# Altium PCB Conv_buck_R1.PcbDoc (part 1 of 2)
Units mm, origin at the board's own origin, x right, y up, seen from the top; angles counter-clockwise.
Board outline 115 x 110 mm, 2 copper layers (Top Layer, Bottom Layer), stack 1.62 mm thick; 149 components, 73 nets, 415 pads, 186 vias.
Unrouted connection lines stored in the file: 3.
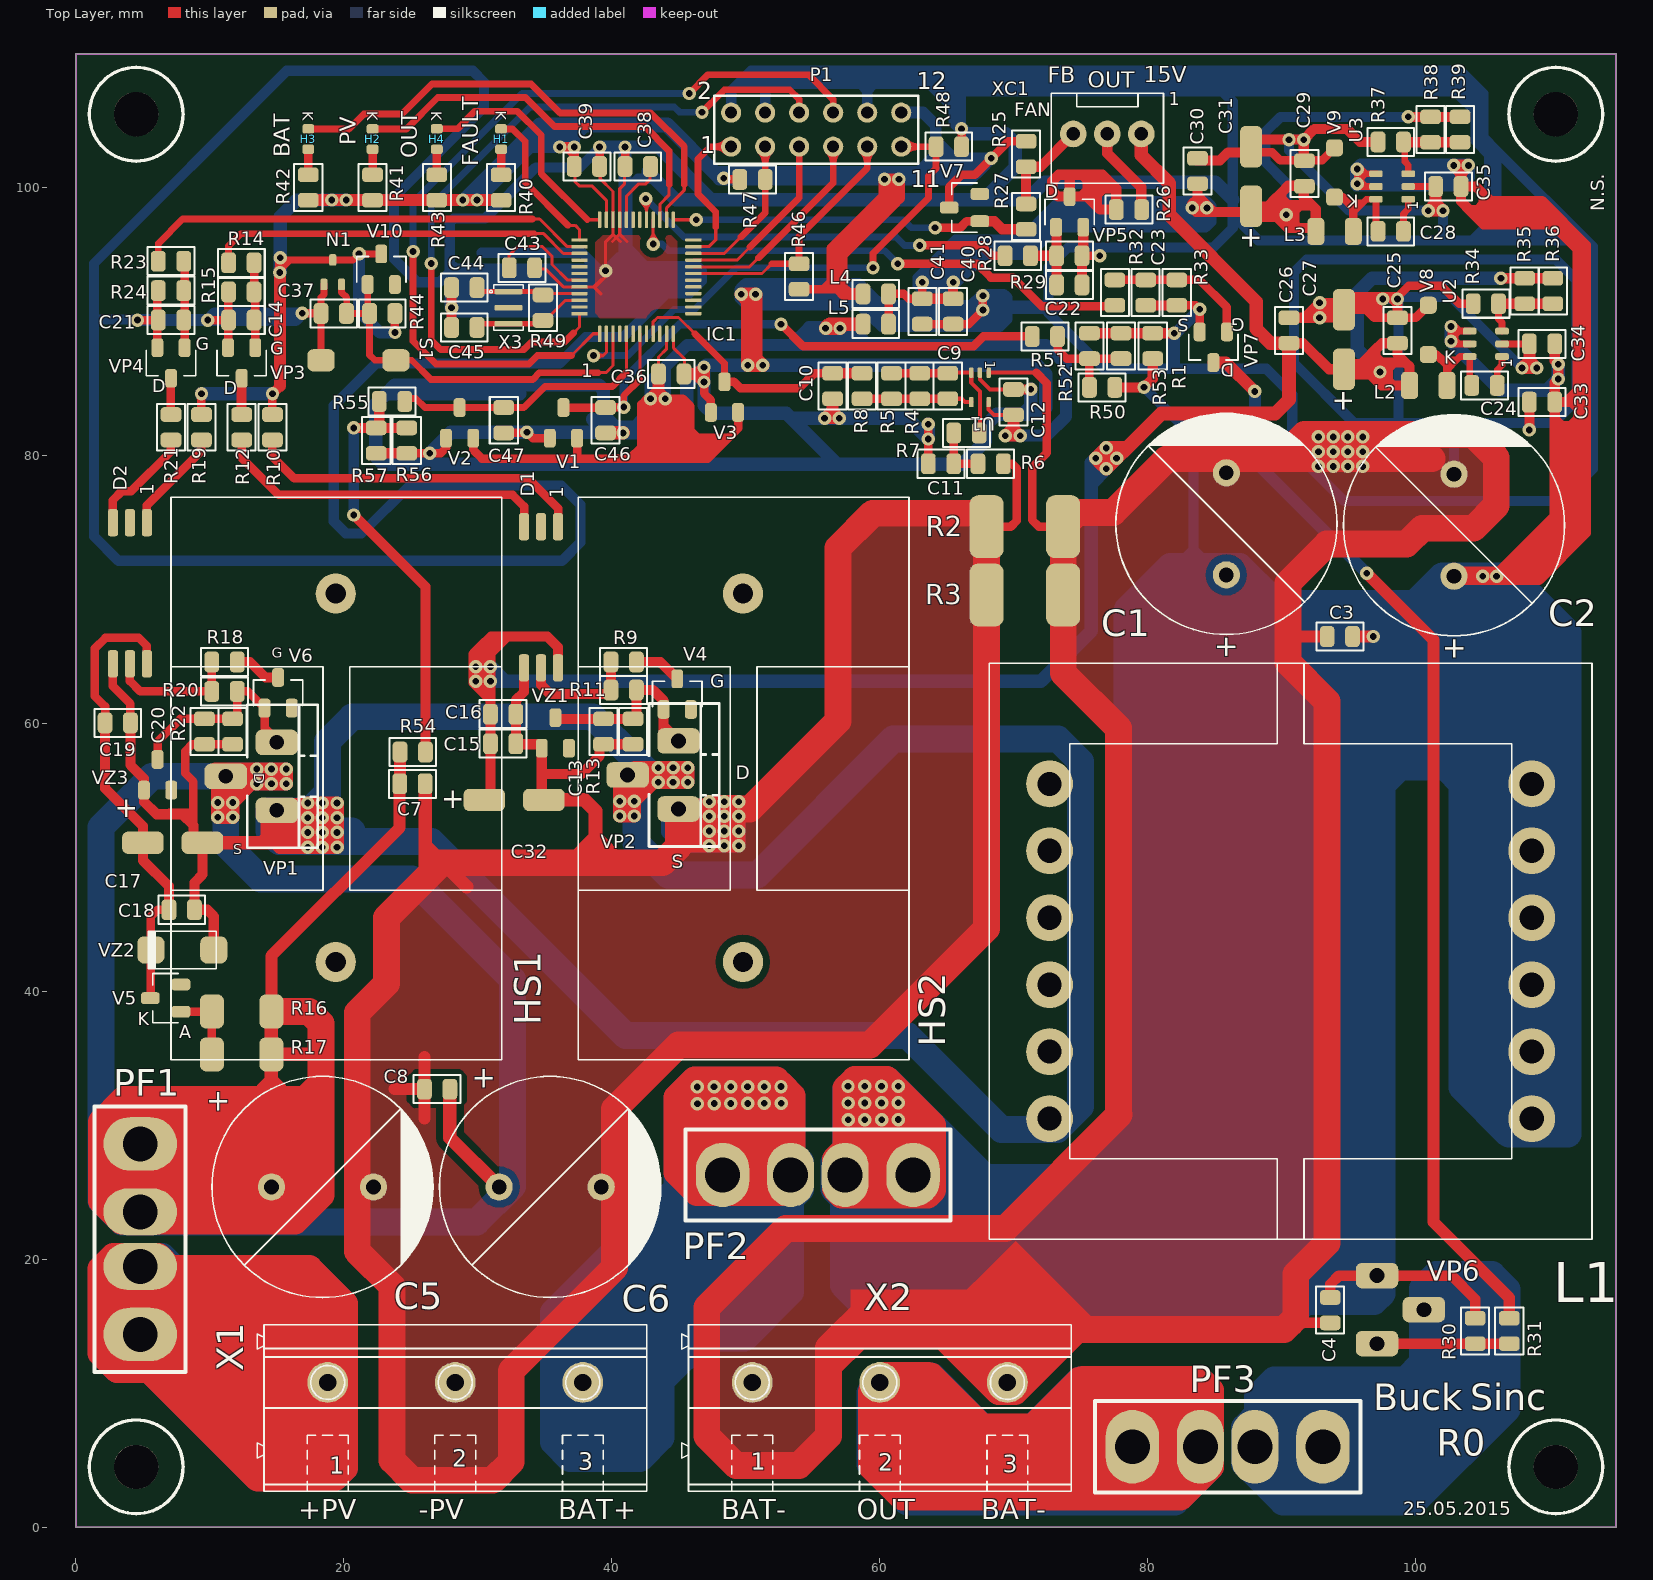
[diagram p0: Top Layer view]
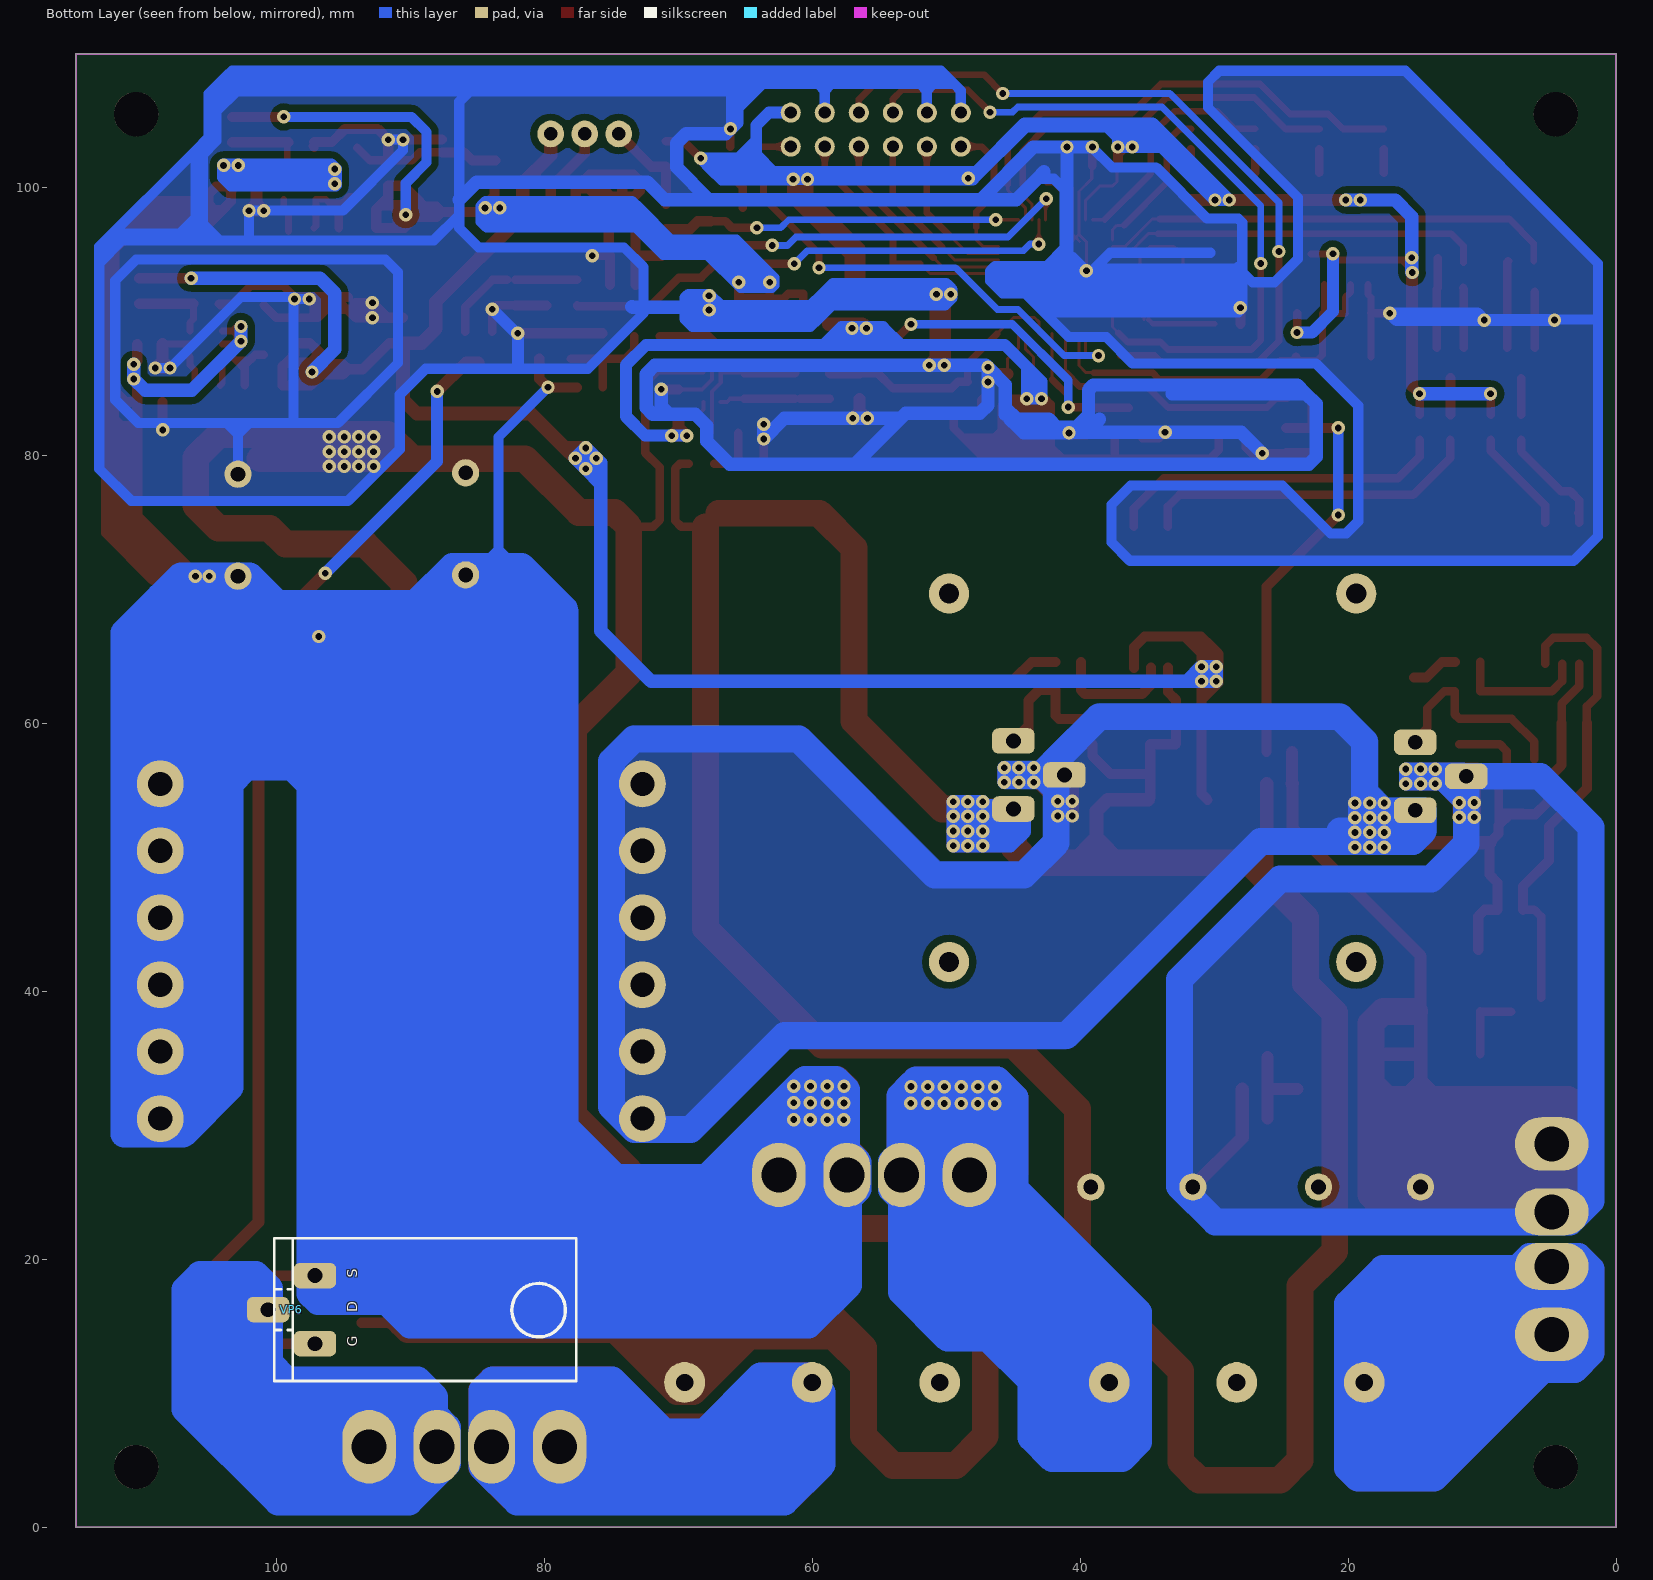
[diagram p1: Bottom Layer view, seen from below]
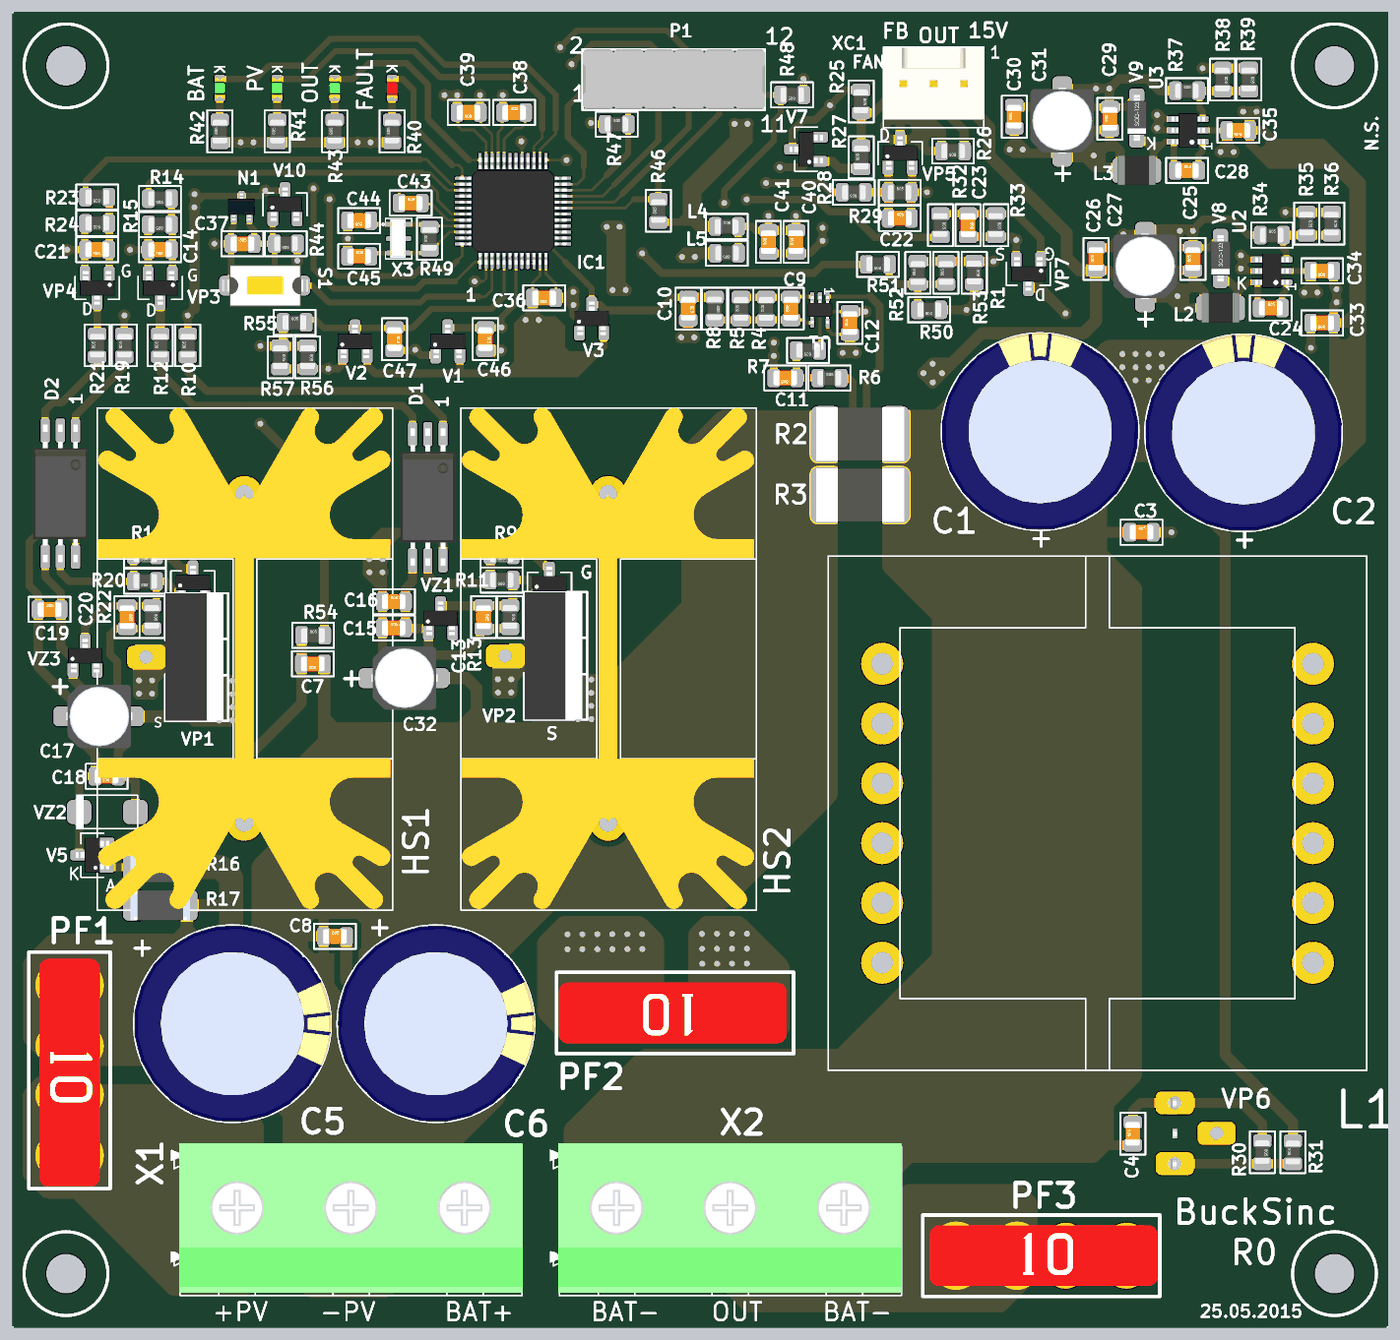
[diagram p3: 3D render of the assembled board from above, using the file's embedded part models]

## Layer stack, top to bottom
Top Layer: signal copper 0.035
Dielectric: core 1.55, FR-4, Dk 4.2
Bottom Layer: signal copper 0.035

## Board outline
0,0 0,110 115,110 115,0

## Design rules (kind name [scope] priority, off if disabled: settings)
AssemblyTestPointUsage [All] p1 off:
AssemblyTestpoint [All] p1 off: testpointundercomponent=TRUE minsize=1.016 maxsize=2.54 preferedsize=1.524 minholesize=0 maxholesize=1.016 preferedholesize=0.813 testpointgrid=0.025 usegrid=FALSE gridtolerance=0 allowsidebottom=TRUE minspacing=2.54
Clearance Terra [InNetClass('Terra') vs InNetClass('-UD') OR InNetClass('DGND')] p1 off: gap=8.001
Clearance -UD [InNetClass('-UD') vs InNetClass('Terra') OR InNetClass('DGND')] p2 off: gap=8.001
Clearance DGND [InNetClass('DGND') vs InNetClass('Terra') OR InNetClass('-UD')] p3 off: gap=8.001
Clearance "Mec Holes" [InNetClass('All Nets') vs InPadClass('Mec Holes')] p4: gap=0.305
Clearance "Fix Holes" [InNetClass('All Nets') vs InPadClass('Fix Holes')] p5: gap=5
Clearance "Keepout Clearance" [InNetClass('All Nets') vs IsKeepOut] p6: gap=0.8
Clearance "Clearance All Typical" [InNetClass('All Nets') vs InNetClass('All Nets')] p7 off: gap=0.508
Clearance "Clearance All 9mils" [All] p8: gap=0.508
ComponentClearance [All] p1 off: gap=0.254 collisioncheckmode=3 verticalgap=0.254 showdistances=FALSE
FabricationTestpoint [All] p1: side=2 testpointundercomponent=TRUE minsize=1.016 maxsize=2.54 preferedsize=1.524 minholesize=0 maxholesize=1.016 preferedholesize=0.813 testpointgrid=0.025 allowsidebottom=TRUE usegrid=FALSE gridtolerance=0 minspacing=2.54
FanoutControl Fanout_BGA [IsBGA] p1 off: bgadir=Out bgaviamode=Centered fanoutstyle=Auto fanoutdirection=Alternating viagrid=0.025 // Fanout_BGA (Default Rule)
FanoutControl Fanout_LCC [IsLCC] p2 off: bgadir=Out bgaviamode=Centered fanoutstyle=Auto fanoutdirection=Alternating viagrid=0.025 // Fanout_LCC (Default Rule)
FanoutControl Fanout_SOIC [IsSOIC] p3 off: bgadir=Out bgaviamode=Centered fanoutstyle=Auto fanoutdirection=Alternating viagrid=0.025 // Fanout_SOIC (Default Rule)
FanoutControl Fanout_Small [(CompPinCount < 5)] p4 off: bgadir=Out bgaviamode=Centered fanoutstyle=Auto fanoutdirection=OutThenIn viagrid=0.025 // Fanout_Small (Default Rule)
FanoutControl Fanout_Default [All] p5 off: bgadir=Out bgaviamode=Centered fanoutstyle=Auto fanoutdirection=Alternating viagrid=0.025 // Fanout_Default (Default Rule)
Height [All] p1 off: minheight=0 maxheight=25.4 prefheight=12.7
HoleSize [All] p1: absolutevalues=TRUE maxlimit=10 minlimit=0.2 maxpercent=80.000 minpercent=20.000
MinimumSolderMaskSliver [All] p1 off: minsoldermaskwidth=0.254
NetAntennae [All] p1 off: netantennaetolerance=0
PolygonConnect "PolygonConnect Power" [All] p1: connectstyle=Direct reliefconductorwidth=0.254 reliefentries=4 polygonreliefangle="90 Angle"
RoutingCorners [All] p1 off: cornerstyle=45-Degree minsetback=2.54 maxsetback=2.54
RoutingVias [All] p1: holewidth=0.3 width=0.635 viastyle="Through Hole" minholewidth=0.2 minwidth=0.635 maxholewidth=0.508 maxwidth=1.27
SilkToSilkClearance [All] p1 off: silktosilkclearance=0.254
SilkscreenOverComponentPads SilkToSolderMaskClearance [IsPad] p1 off: minsilkscreentomaskgap=0.254
SolderMaskExpansion [All] p1: expansion=0.102
Width [All] p1: maxlimit=12.7 minlimit=0.229 preferedwidth=0.254
12 further rules are at their usual default settings.

## Classes and differential pairs
component class Driver_SW: C17 C18 C19 C20 C21 D2 R16 R17 R18 R19 R20 R21 R22 R23 R24 V5 V6 VP4 VZ2 VZ3
component class Converter: C1 C2 C3 C4 C5 C6 C7 C8 L1 R1 R2 R3 VP1 VP2 X1 X2
component class Buck_converter: V1 V2 V3
component class Current_measure_bat: C9 C10 C11 C12 R4 R5 R6 R7 R8 U1
component class Voltage_measure_pv: C47 R54 R55 R56 R57
channel class Voltage_measure: Voltage_measure_bat Voltage_measure_pv
component class Driver_rect: C13 C14 C15 C16 C32 D1 R9 R10 R11 R12 R13 R14 R15 V4 VP3 VZ1
component class FAN: C22 R25 R26 R27 R28 R29 V7 VP5 XC1
component class Output: C23 R30 R31 R32 R33 VP6 VP7
component class SMPS: C24 C25 C26 C27 C28 C29 C30 C31 C33 C34 C35 L2 L3 R34 R35 R36 R37 R38 R39 U2 U3 V8 V9
component class uC: C36 C37 C38 C39 C40 C41 C43 C44 C45 H1 H2 H3 H4 IC1 L4 L5 N1 P1 R40 R41 R42 R43 R44 R46 R47 R48 R49 S1 V10 X3
component class Voltage_measure_bat: C46 R50 R51 R52 R53

## Components (designator, comment, footprint, x,y, rotation, side; value= is the part's Value field where it differs from the comment)
C1 "10190340" "CR 1.1 7.62 16.5" 85.9,71.1 r90 top locked
C2 "10190340" "CR 1.1 7.62 16.5" 102.9,71 r90 top locked
C3 "10192075" C0805_R_V0 94.375,66.5 r0 top
C4 "11736520" C0805_R_V0 93.65,16.2 r90 top
C5 "10190340" "CR 1.1 7.62 16.5" 14.6,25.4 r0 top
C6 "10190340" "CR 1.1 7.62 16.5" 31.6,25.4 r0 top
C7 "10192075" C0805_R_V0 25.125,55.5 r180 top
C8 "11736520" C0805_R_V0 26.975,32.7 r0 top
C9 "10192075" C0805_R_V0 65.1,85.2 r90 top
C10 "10192075" C0805_R_V0 56.5,85.2 r270 top
C11 "10192075" C0805_R_V0 64.6,79.4 r180 top
C12 "10192075" C0805_R_V0 70,84 r90 top
C13 "10192075" C0805_R_V0 39.4,59.4 r270 top (schematic designator C41)
C14 "10192075" C0805_R_V0 12.35,90.125 r180 top (schematic designator C42)
C15 "11736520" C0805_R_V0 31.9,58.5 r0 top (schematic designator C43)
C16 "10192075" C0805_R_V0 31.9,60.7 r0 top (schematic designator C44)
C17 "11690909" "CAP UUD CR 5X5.8" 5,51.1 r0 top (schematic designator C13)
C18 "11736520" C0805_R_V0 7.9,46.1 r180 top (schematic designator C14)
C19 "10192075" C0805_R_V0 3.125,60.05 r0 top (schematic designator C15)
C20 "10192075" C0805_R_V0 9.6,59.4 r270 top (schematic designator C16)
C21 "10192075" C0805_R_V0 7.1,90.125 r180 top (schematic designator C17)
C22 "10192075" C0805_R_V0 74.175,92.75 r0 top (schematic designator C46)
C23 "10192075" C0805_R_V0 79.875,92.175 r270 top (schematic designator C45)
C24 "11736520" C0805_R_V0 105.175,85.25 r0 top (schematic designator C18)
C25 "10192075" C0805_R_V0 98.675,89.35 r90 top (schematic designator C19)
C26 "11736520" C0805_R_V0 90.575,89.35 r90 top (schematic designator C20)
C27 "11690909" "CAP UUD CR 5X5.8" 94.675,86.45 r90 top (schematic designator C21)
C28 "11736520" C0805_R_V0 98.175,96.75 r0 top (schematic designator C22)
C29 "10192075" C0805_R_V0 91.725,101.075 r90 top (schematic designator C23)
C30 "11736520" C0805_R_V0 83.75,101.25 r90 top (schematic designator C24)
C31 "11690909" "CAP UUD CR 5X5.8" 87.75,98.625 r90 top (schematic designator C25)
C32 "11690909" "CAP UUD CR 5X5.8" 30.5,54.3 r0 top (schematic designator C26)
C33 "11736520" C0805_R_V0 109.475,84 r180 top (schematic designator C27)
C34 "10192075" C0805_R_V0 109.475,88.35 r180 top (schematic designator C28)
C35 "10192075" C0805_R_V0 102.475,100.1 r180 top (schematic designator C29)
C36 "2u2F 6.8V 10%" C0805_R_V0 44.45,86.1 r180 top (schematic designator C30)
C37 "11736520" C0805_R_V0 19.25,90.625 r0 top (schematic designator C31)
C38 "2u2F 6.8V 10%" C0805_R_V0 41.95,101.6 r0 top (schematic designator C32)
C39 "1uF 50V 10%" C0805_R_V0 38.15,101.6 r180 top (schematic designator C33)
C40 "1uF 50V 10%" C0805_R_V0 65.5,90.775 r90 top (schematic designator C34)
C41 "100nF 6.8V 10%" C0805_R_V0 63.2,90.775 r90 top (schematic designator C35)
C43 "2u2F 6.8V 10%" C0805_R_V0 33.3,94.025 r0 top (schematic designator C37)
C44 "36pF 50V" C0805_R_V0 29,92.55 r180 top (schematic designator C38)
C45 "36pF 50V" C0805_R_V0 29,89.575 r0 top (schematic designator C39)
C46 "10192075" C0805_R_V0 39.55,82.65 r270 top (schematic designator C40)
C47 "10192075" C0805_R_V0 31.95,82.65 r270 top (schematic designator C40)
D1 "12544475" "SO-6 (11.5 MM)" 36,74.7 r270 top (schematic designator D2)
D2 "12544475" "SO-6 (11.5 MM)" 5.3,75 r270 top (schematic designator D1)
H1 "12133537" "LED 0603_12133537(Primary)" 31.749,104.4 r270 top
H2 "12133535" "LED 0603_12133535(Primary)" 22.15,104.4 r270 top
H3 "12133535" "LED 0603_12133535(Primary)" 17.35,104.4 r270 top
H4 "12133535" "LED 0603_12133535(Primary)" 26.95,104.408 r270 top
HS1 "Comment" DISSIPADOR_N004_40_V1 7.1,76.9 r270 top locked
HS2 "Comment" DISSIPADOR_N004_40_V1 37.5,76.9 r270 top locked
IC1 "TMS320F28027_PT" LQFP48 39.1,89.1 r90 top
L1 "INDUTOR 100uH EE42" "INDUTOR EE42_V1" 90.7,43 r0 top
L2 "12924787" L1210 102.375,85.25 r180 top
L3 "12924787" L1210 95.375,96.75 r180 top
L4 "Inductor" R0805_R_V0 59.725,92.075 r0 top
L5 "Inductor" R0805_R_V0 59.725,89.825 r180 top
N1 "10050567" SC70A 19.175,93.7 r0 top
P1 "Header 6X2" HDR2X6_V0 48.925,103.075 r0 top locked
PF1 "Comment" FUSE_HOLDER#1 4.8,21.5 r90 top
PF2 "Comment" FUSE_HOLDER#2 55.4,26.3 r0 top
PF3 "Comment" FUSE_HOLDER#1 86,6 r180 top
R1 "10118077" R0805_R_V0 80.4,88.2 r270 top
R2 "11372881" WSL2816A 68,74.7 r0 top
R3 "11372881" WSL2816A 68,69.6 r0 top
R4 "10118077" R0805_R_V0 63,85.2 r90 top
R5 "10118077" R0805_R_V0 60.9,85.2 r90 top
R6 "10118077" R0805_R_V0 68.3,79.4 r0 top
R7 "10118077" R0805_R_V0 66.5,81.7 r180 top
R8 "10118077" R0805_R_V0 58.7,85.2 r270 top
R9 "10118077" R0805_R_V0 40.9,64.6 r180 top (schematic designator R38)
R10 "10118077" R0805_R_V0 14.675,82.125 r90 top (schematic designator R39)
R11 "10118077" R0805_R_V0 40.9,62.5 r180 top (schematic designator R40)
R12 "10118077" R0805_R_V0 12.375,82.125 r90 top (schematic designator R41)
R13 "10118077" R0805_R_V0 41.6,59.4 r270 top (schematic designator R42)
R14 "10118077" R0805_R_V0 12.35,94.4 r180 top (schematic designator R43)
R15 "10118077" R0805_R_V0 12.35,92.225 r180 top (schematic designator R44)
R16 "10191999" R2010A 14.6,38.5 r180 top (schematic designator R9)
R17 "10191999" R2010A 14.6,35.3 r180 top (schematic designator R10)
R18 "10118077" R0805_R_V0 11.1,64.6 r180 top (schematic designator R11)
R19 "10118077" R0805_R_V0 9.375,82.125 r90 top (schematic designator R12)
R20 "10118077" R0805_R_V0 11.1,62.4 r180 top (schematic designator R13)
R21 "10118077" R0805_R_V0 7.1,82.125 r90 top (schematic designator R14)
R22 "10118077" R0805_R_V0 11.7,59.4 r270 top (schematic designator R15)
R23 "10118077" R0805_R_V0 7.1,94.525 r180 top (schematic designator R16)
R24 "10118077" R0805_R_V0 7.1,92.325 r180 top (schematic designator R17)
R25 "10118077" R0805_R_V0 70.95,102.525 r270 top (schematic designator R49)
R26 "10118077" R0805_R_V0 78.625,98.375 r180 top (schematic designator R50)
R27 "10118077" R0805_R_V0 70.95,97.85 r90 top (schematic designator R51)
R28 "10118077" R0805_R_V0 70.325,94.925 r180 top (schematic designator R52)
R29 "10118077" R0805_R_V0 74.175,94.925 r0 top (schematic designator R53)
R30 "10118077" R0805_R_V0 104.475,14.65 r270 top (schematic designator R45)
R31 "10118077" R0805_R_V0 107.025,14.65 r90 top (schematic designator R46)
R32 "10118077" R0805_R_V0 77.575,92.175 r270 top (schematic designator R47)
R33 "10118077" R0805_R_V0 82.2,92.175 r270 top (schematic designator R48)
R34 "10191981" R0805_R_V0 105.275,91.35 r0 top (schematic designator R18)
R35 "10191981" R0805_R_V0 108.175,92.3 r270 top (schematic designator R19)
R36 "10191981" R0805_R_V0 110.275,92.3 r270 top (schematic designator R20)
R37 "10191981" R0805_R_V0 98.175,103.425 r0 top (schematic designator R21)
R38 "10191981" R0805_R_V0 101.15,104.35 r270 top (schematic designator R22)
R39 "10191981" R0805_R_V0 103.35,104.35 r270 top (schematic designator R23)
R40 "10191962" R0805_R_V0 31.75,100.025 r90 top (schematic designator R24)
R41 "10191962" R0805_R_V0 22.15,100.025 r90 top (schematic designator R25)
R42 "10191962" R0805_R_V0 17.35,100.025 r90 top (schematic designator R26)
R43 "10191962" R0805_R_V0 26.95,100.025 r90 top (schematic designator R27)
R44 "11417855" R0805_R_V0 22.875,90.625 r180 top (schematic designator R28)
R46 "1k 5% 0805" R0805_R_V0 54,93.375 r90 top (schematic designator R30)
R47 "1k 5% 0805" R0805_R_V0 50.525,100.625 r0 top (schematic designator R31)
R48 "1k 5% 0805" R0805_R_V0 65.175,103.075 r180 top (schematic designator R32)
R49 "1M 1% 0805" R0805_R_V0 34.875,91.05 r90 top (schematic designator R33)
R50 "10118077" R0805_R_V0 76.625,85.1 r180 top (schematic designator R34)
R51 "10118077" R0805_R_V0 72.35,88.9 r180 top (schematic designator R35)
R52 "10118077" R0805_R_V0 75.675,88.2 r90 top (schematic designator R36)
R53 "10118077" R0805_R_V0 78.038,88.2 r90 top (schematic designator R37)
R54 "10118077" R0805_R_V0 25.15,57.875 r0 top (schematic designator R34)
R55 "10118077" R0805_R_V0 23.6,84.05 r0 top (schematic designator R35)
R56 "10118077" R0805_R_V0 24.7,81.125 r270 top (schematic designator R36)
R57 "10118077" R0805_R_V0 22.425,81.125 r270 top (schematic designator R37)
S1 "10050610" "TECLA STSM BOURNS" 21.1,87.125 r0 top
U1 "OPA348AIDCKR" "DCK R-PDSO-G5" 67.5,85.1 r270 top
U2 "12576507" SOT23-6 105.275,88.35 r90 top
U3 "12576507" SOT23-6 98.275,100.1 r90 top
V1 "DIODO BAS40" SOT23-BAV99A 36.4,82.45 r0 top
V2 "DIODO BAS40" SOT23-BAV99A 28.65,82.45 r0 top
V3 "DIODO BAS40" SOT23-BAV99A 48.425,84.375 r0 top
V4 "10261302" SOT23A 44.9,62.2 r0 top (schematic designator V9)
V5 "10261302" SOT23A 6.7,39.5 r90 top (schematic designator V4)
V6 "10261302" SOT23A 15.1,62.3 r0 top (schematic designator V5)
V7 "10261302" SOT23A 66.35,98.525 r90 top (schematic designator V10)
V8 "10192125" SOD123A 100.975,87.55 r90 top (schematic designator V6)
V9 "10192125" SOD123A 93.975,99.3 r90 top (schematic designator V7)
V10 "10192124" SOT23A 22.8,93.925 r0 top (schematic designator V8)
VP1 "10190449" TO-220AB_V1 15,58.6 r270 top
VP2 "10190449" TO-220AB_V1 45,58.7 r270 top
VP3 "11110327" MOS_SOT23A 12.375,86.925 r180 top (schematic designator VP4)
VP4 "11110327" MOS_SOT23A 7.1,86.925 r180 top (schematic designator VP3)
VP5 "11110327" MOS_SOT23A 74.2,98.2 r0 top (schematic designator VP7)
VP6 "10190449" TO-220AB_H_V1 97.15,13.7 r90 bottom (schematic designator VP5)
VP7 "11110327" MOS_SOT23A 84.925,88.1 r180 top (schematic designator VP6)
VZ1 "10050447" ZEN_SOT23A 35.8,59.3 r0 top (schematic designator VZ3)
VZ2 "12665621" DO-214AC_12665621(Primary) 5.6,43.1 r0 top (schematic designator VZ1)
VZ3 "10050447" ZEN_SOT23A 6.1,56.175 r0 top (schematic designator VZ2)
X1 "10233722" 662-A-111/03-SM 18.8,10.8 r0 top
X2 "10233722" 662-A-111/03-SM 50.5,10.8 r0 top
X3 "XTAL 60MHz" "XTAL  CSTCE_G_A" 32.3,91.05 r90 top
XC1 "10190697" "MOLEX 3P 180G M" 79.55,104.025 r0 top

## Footprints (in the part's own frame and the unit in brackets; to place one, negate y for a bottom-side part, rotate by r counter-clockwise, add the part's x,y. Pads: shape width x height; smd on the part's side, far side on the other; paste and mask are expansions set on the pad)
662-A-111/03-SM [mil]
  round 120 hole 51.18: 1(0,0) 2(375,0) 3(750,0)
  silkscreen extent -208,-320 938,170, body extent -218,-311 939,181, height 847
C0805_R_V0 [mm] "IPC"
  rrect50% 1.1x1.55 smd: 1(0.95,0) 2(-0.95,0)
  silkscreen extent -1.75,-1.05 1.75,1.05, body extent -1,-0.62 1,0.63, height 0.78
"CAP UUD CR 5X5.8" [mm]
  rrect50% 3.1x1.651 smd: 1(0,0) 2(4.445,0)
  body extent -0.46,-2.65 5.04,2.65, height 6
"CR 1.1 7.62 16.5" [mil]
  round 80 hole 43.31: 1(0,0) 2(300,0)
  silkscreen extent -175,-325 475,325, body extent -174,-324 475,324, height 1030
"DCK R-PDSO-G5" [mm] "SOT23, 5-Leads, Body 2x1.25mm, Pitch 0.65mm"
  rrect50% 0.762x0.338 smd: 1(-1.1,0.65) 2(-1.1,0) 3(-1.1,-0.65) 4(1.1,-0.65) 5(1.1,0.65)
  body extent -1.15,-1.05 1.15,1.05, height 1
DISSIPADOR_N004_40_V1 [mm] "AAVID_6298B_ 5mm from board"
  round 3 hole 1.5: Fix1(7.2,12.3) Fix1(34.7,12.3)
  silkscreen extent 0,0 42,24.7, body extent -0.01,0.08 41.9,24.52, height 27.9
DO-214AC_12665621(Primary) [mil]
  rrect50% 80x80 smd: A(185,0) K(0,0)
  silkscreen extent -8,-55 192,55
FUSE_HOLDER#1 [mm] "Automotive 3522-2 Keystone"
  oval 4x5.5 hole 2.6: 1(-7.112,0) 2(7.112,0)
  oval 3.5x5.5 hole 2.6: 1(-2.032,0) 2(2.032,0)
  silkscreen extent -9.9,-3.4 9.9,3.4, body extent -9.72,-2.54 9.33,2.54, height 20
FUSE_HOLDER#2 [mm] "Automotive 3522-2 Keystone"
  oval 4x4.8 hole 2.6: 1(-7.112,0) 2(7.112,0)
  oval 3.5x4.8 hole 2.6: 1(-2.032,0) 2(2.032,0)
  silkscreen extent -9.9,-3.4 9.9,3.4, body extent -9.72,-2.54 9.33,2.54, height 20
HDR2X6_V0 [mm] "Connector; Header; 6x2 Position"
  round 1.5 hole 0.9: 1(0,0) 2(0,2.54) 3(2.54,0) 4(2.54,2.54) 5(5.08,0) 6(5.08,2.54) 7(7.62,0) 8(7.62,2.54) 9(10.16,0) 10(10.16,2.54) 11(12.7,0) 12(12.7,2.54)
  silkscreen extent -1.27,-1.27 13.97,3.81, body extent -1.22,-1.2 14.02,3.8, height 8.8
"INDUTOR EE42_V1" [mm]
  round 3.5 hole 1.8: 1(-18,-12.5) 1(-18,-7.5) 1(-18,-2.5) 1(-18,2.5) 1(-18,7.5) 1(-18,12.5) 2(18,-12.5) 2(18,-7.5) 2(18,-2.5) 2(18,2.5) 2(18,7.5) 2(18,12.5)
  silkscreen extent -22.5,-21.5 22.5,21.5, body extent -22.5,-21.5 22.5,21.5, height 35
L1210 [mil] "Indutor SMD"
  rrect50% 50x80 smd: 1(0,0) 2(110,0)
  body extent -8,-50 118,48, height 98
"LED 0603_12133535(Primary)" [mil]
  rrect50% 28x35 smd: A(60,0) K(0,0)
  body extent -3,-18 63,18, height 35
"LED 0603_12133537(Primary)" [mil]
  rrect50% 28x35 smd: A(60,0) K(0,0)
  body extent -2,-18 64,18, height 35
LQFP48 [mil]
  rrect50% 48x10 smd: 1(0.15,-0.2) 2(0.15,-19.89) 3(0.15,-39.57) 4(0.15,-59.26) 5(0.15,-78.94) 6(0.15,-98.63) 7(0.15,-118.32) 8(0.15,-138) 9(0.15,-157.69) 10(0.15,-177.37) 11(0.15,-197.06) 12(0.15,-216.74) 25(335.3,-216.74) 26(335.3,-197.06) 27(335.3,-177.37) 28(335.3,-157.69) 29(335.3,-138) 30(335.3,-118.32) 31(335.3,-98.63) 32(335.3,-78.94) 33(335.3,-59.26) 34(335.3,-39.57) 35(335.3,-19.89) 36(335.3,-0.2)
  rrect50% 10x48 smd: 13(59.2,-275.8) 14(78.89,-275.8) 15(98.57,-275.8) 16(118.26,-275.8) 17(137.94,-275.8) 18(157.63,-275.8) 19(177.31,-275.8) 20(197,-275.8) 21(216.68,-275.8) 22(236.37,-275.8) 23(256.06,-275.8) 24(275.74,-275.8) 37(275.74,58.85) 38(256.06,58.85) 39(236.37,58.85) 40(216.68,58.85) 41(197,58.85) 42(177.31,58.85) 43(157.63,58.85) 44(137.94,58.85) 45(118.26,58.85) 46(98.57,58.85) 47(78.89,58.85) 48(59.2,58.85)
  body extent -10,-286 345,69, height 63
"MOLEX 3P 180G M" [mm]
  round 2 hole 1: 1(0,0) 2(-2.54,0) 3(-5.08,0)
  silkscreen extent -6.73,-3.68 1.65,3.05, body extent -6.69,-3 1.61,3, height 11.5
MOS_SOT23A [mil]
  rrect50% 35x55 smd: D(0,45) G(-40,-45) S(40,-45)
  silkscreen extent -72,-38 72,38, body extent -57,-55 57,55, height 51
R0805_R_V0 [mm] "IPC"
  rrect50% 1.1x1.55 smd: 1(0.95,0) 2(-0.95,0)
  silkscreen extent -1.75,-1.05 1.75,1.05, body extent -1.02,-0.63 0.98,0.62, height 0.78
R2010A [mil]
  rrect50% 70x100 smd: 1(0,0) 2(175,0)
  body extent -11,-50 186,50, height 22
SC70A [mil]
  rrect50% 20.98x34 smd: GND(-26,-36) VCC(0,36) ~RESET(26,-36)
  body extent -44,-44 44,44, height 44
"SO-6 (11.5 MM)" [mil]
  rrect50% 80x30 smd: 1(0,0) 2(0,-50) 3(0,-100) 4(415,-100) 5(415,-50) 6(415,0)
  body extent -19,-140 433,40, height 130
SOD123A [mil]
  rrect50% 50x50 smd: A(145,0) K(0,0)
  body extent -3,-34 149,33, height 57
SOT23-6 [mil]
  rrect50% 20x40 smd: 1(-37.5,-47.5) 2(0,-47.5) 3(37.5,-47.5) 4(37.5,47.5) 5(0,47.5) 6(-37.5,47.5)
  body extent -57,-55 57,55, height 57
SOT23-BAV99A [mil]
  rrect50% 35x55 smd: A(-40,-45) AK(0,45) K(40,-45)
  body extent -57,-55 57,55, height 51
SOT23A [mil]
  rrect50% 35x55 smd: A(-40,-45) K(0,45) NC(40,-45)
  silkscreen extent -72,-38 72,38, body extent -57,-55 57,55, height 51
"TECLA STSM BOURNS" [mil]
  rrect50% 80x65 smd: 1(-110,0) 2(110,0)
  body extent -140,-69 144,69, height 169
TO-220AB_H_V1 [mm]
  rrect50% 1.905x3.175 hole 1.1: D(2.54,3.5) G(0,0) S(5.08,0)
  silkscreen extent -2.79,-19.5 7.87,3.05, body extent -2.5,-19.5 7.5,0.2, height 6
TO-220AB_V1 [mm]
  rrect50% 1.905x3.175 hole 1.1: D(2.54,-3.81) G(0,0) S(5.08,0)
  silkscreen extent -2.79,-2.21 7.87,3.05, body extent -2.8,-2.18 7.88,2.65, height 19.89
WSL2816A [mm]
  rrect50% 2.54x4.7 smd: 1(0,0) 2(5.715,0)
  body extent -0.82,-2.22 6.53,2.23, height 0.91
"XTAL  CSTCE_G_A" [mm]
  rrect50% 0.4x2.1 smd: 0(0,0) 1(1.2,0) 2(-1.2,0)
  silkscreen extent -1.7,-1.1 1.7,1.4, body extent -1.6,-0.6 1.6,0.7, height 0.7
ZEN_SOT23A [mil]
  rrect50% 35x55 smd: A(-40,-45) K(0,45) NC(40,-45)
  body extent -57,-55 57,55, height 51

## Part data
C1 C2 C5 C6: "CAP ELE 1000uF 50V"
C3 C7 C9 C10 C11 C12 C13 C14 C16 C19 C20 C21 C22 C23 C25 C29 C34 C35 C46 C47: "CER SMD 100nF 50V"
C4 C8 C15 C18 C24 C26 C28 C30 C33 C37: "CER SMD X7R 1uF 50V 10%"
C17 C27 C31 C32: "CAP. ELET. SMD 22uF 35V"
C36 C38 C39 C40 C41 C43: library part 11736520, "CER SMD X7R 1uF 50V 10%"
C44 C45: library part 11736520, "CER SMD C0G 36pF 50V"
D1 D2: "CI SMD ACPL-W343"
H1: "LED SMD VM (0603)"
H2 H3 H4: "LED SMD VD (0603)"
IC1: "LQFP48"
L1: library part 12578205, "INDUTOR 560uH 4A PCV-2"
L2 L3: "INDUTOR SMD 47uH 390mA"
N1: "CI SMD ADM803TAKSZ"
P1: "Header, 6-Pin, Dual row"
R1 R4 R5 R6 R7 R8 R9 R10 R11 R12 R13 R14 R15 R18 R19 R20 R21 R22 R23 R24 R25 R26 R27 R28 R29 R30 R31 R32 R33 R50 R51 R52 R53 R54 R55 R56 R57: "RFM SMD 1K 1% 0.1W"
R2 R3: "RFM SMD 0R015 1% 2W"
R16 R17: "RFM SMD 1K 1% 0.5W"
R34 R35 R36 R37 R38 R39: "RFM SMD 150R 1% 0.1W"
R40 R41 R42 R43: "RFM SMD 330R 5% 0.1W"
R44: "RES SMD 4K7 5% 0,063W"
R46 R47 R48 R49: library part Res3_2, "Resistor"
S1: "Tecla SMD STSM-31-STR"
U1: "1 MHz, 45 uA, RRIO, Single Operational Amplifier, 2.1 to 5.5 V, -40 to 125 degC, 5-pin SOT23 (DCK5), Green (RoHS & no Sb/Br)"
U2 U3: "CI SMD LM2842"
V1 V2 V3 V10: "DIODO SMD BAS40"
V4 V5 V6 V7: "DIODO SMD BAS16"
V8 V9: "Diodo SMD MBR0540 (SCHOTTKY)"
VP1 VP2 VP6: "MOSFET IRFB31N20D"
VP3 VP4 VP5 VP7: "MOSFET SMD BSH111"
VZ1 VZ3: "Zener  SMD BZX84C18"
VZ2: "ZENER SMD 15V 2W"
X1 X2: "CON. EK950V-03P"
X3: library part XTAL, "Crystal Oscillator"
XC1: "CON MOLEX 3P 180G"

## Free pads (board coordinates)
  round 3.3 hole 3.3 unplated mask+0.102: Fix-1(4.5,4.5) Fix-2(110.5,4.5) Fix-3(110.5,105.5) Fix-4(4.5,105.5)

## Via types
v1: diameter 1, hole 0.5, Top Layer to Bottom Layer, tented both sides, 186 vias

## Nets (pads, with @x,y where several pads share a name; then routed paths per layer and width w, separated by ;. In a path a pad name is that pad's centre, name@x,y a point inside that pad or via, vN(x,y) a via of type N, cw(c..) or ccw(c..) an arc to the next point about the centre after c; other vN are vias at no path point)
3V3: C29.2 C30.2 C31.1 C40.1 C41.1 L3.2 L4.1 L5.2 R38.2 R39.2 | length 139.4
  Top Layer w0.635: L5.2@60.675,89.825 L4.1@60.675,92.075 61.825,92.075 62.175,91.725 C41.1@63.2,91.725 v1(63.2,92.95)
  Top Layer w0.762: C41.1@63.2,91.725 C40.1@65.5,91.725 v1(65.5,92.95) ; C30.2@83.675,100.15 C30.2@83.75,100.15 ; C30.2@83.75,100.3 C30.2@83.75,100.15 ; v1@90.575,97.7 89.975,98.3 ; v1(99.475,105.3) R39.2@103.35,105.3 ; v1(83.35,98.5) 83.75,98.9 83.75,99.2 ; v1(83.35,98.5) 83.65,98.2 v1@84.75,98.2 ; v1(83.35,98.5) 83.35,98.8 83.75,99.2 ; 83.75,99.2 83.75,99.425 ; 83.75,99.2 v1(84.45,98.5) v1@84.75,98.2 ; 83.75,99.425 C30.2@83.75,100.15 ; 83.75,99.425 84.975,98.2 ; v1@84.75,98.2 84.975,98.2 ; 84.975,98.2 C31.1@87.675,98.2 ; C31.1@87.675,98.2 88.05,97.825 89.65,97.825 ; C31.1@87.675,98.2 88.075,98.6 88.975,98.6 ; C31.1@87.675,98.2 C31.1@88.575,98.2 ; C31.1@88.575,98.2 89.275,98.2 89.65,97.825 ; C31.1@88.575,98.2 88.975,98.6 ; 88.975,98.6 89.275,98.9 ; 89.275,98.9 89.375,98.9 ; 89.275,98.9 89.375,99 ; 89.375,98.9 89.375,99 ; 89.375,98.9 89.975,98.3 ; 89.375,99 90.025,99.65 ; 89.65,97.825 90.475,97 91.275,97 ; 89.975,98.3 90.975,98.3 ; 90.025,99.65 90.025,99.15 90.475,98.7 91.375,98.7 ; 90.025,99.65 90.525,100.15 91.675,100.15 91.675,99.3 92.275,98.7 ; 90.975,98.3 91.375,98.7 ; 90.975,98.3 90.975,97.3 91.275,97 ; 91.275,97 92.581,97 92.581,98.394 92.275,98.7 ; 91.375,98.7 92.275,98.7
  Bottom Layer w0.762: v1@63.2,92.975 v1@65.5,92.975 ; v1@63.2,93.125 66.2,96.125 ; v1@65.5,93.125 67.375,95 67.85,95 ; v1(90.375,98) 90.375,100.35 88.825,101.9 88.825,104.175 89.95,105.3 v1(99.475,105.3) ; 66.2,96.125 70.575,96.125 72.95,98.5 ; 66.2,96.125 65.675,96.125 62.85,93.3 62.85,92.725 63.044,92.531 65.381,92.531 67.85,95 ; 67.85,95 71.154,95 73.204,97.05 83.825,97.05 ; 72.95,98.5 v1(83.35,98.5) v1(84.45,98.5) 84.45,97.675 83.825,97.05 ; 72.95,98.5 73.475,99.025 84.4,99.025 84.775,98.65 84.775,97.475 84.35,97.05 83.825,97.05
15V: C15.2 C16.2 C25.2 C26.2 C27.1 C32.1 D1.6 L2.2 R35.2 R36.2 XC1.1 | length 200.8
  Top Layer w0.762: C32.1@30.5,54.3 30.95,54.75 C15.2@30.95,58.5 30.95,61.8 ; D1.6@36,64.159 36,65.7 35.2,66.5 32.2,66.5 ; C26.2@90.675,88.4 91.625,88.4 93.575,86.45 C27.1@94.675,86.45 ; v1@97.575,85.95 96.975,86.55 ; v1(106.4,93.25) R35.2@108.175,93.25 R36.2@110.275,93.25 ; 30.3,62.45 30.95,61.8 ; 30.3,62.45 30.3,65.45 ; 30.3,62.45 29.7,63.05 29.7,65.2 30.3,65.8 ; 30.3,65.45 31.35,66.5 ; 30.3,65.45 30.3,65.8 ; 30.3,65.8 31,66.5 31.35,66.5 ; 30.95,61.8 v1(30.95,63.15) v1(30.95,64.25) 30.95,65.25 32.2,66.5 ; 31.35,66.5 32.2,66.5 ; C27.1@94.675,86.45 95.075,86.85 95.975,86.85 ; C27.1@94.675,86.45 95.05,86.075 96.65,86.075 ; C27.1@94.675,86.45 95.575,86.45 ; 95.575,86.45 95.975,86.85 ; 95.575,86.45 96.275,86.45 96.65,86.075 ; 95.975,86.85 96.275,87.15 ; 96.275,87.15 96.375,87.25 ; 96.275,87.15 96.375,87.15 ; 96.375,87.15 96.975,86.55 ; 96.375,87.15 96.375,87.25 ; 96.375,87.25 97.025,87.9 ; 96.65,86.075 97.475,85.25 98.275,85.25 ; 96.975,86.55 97.975,86.55 ; 97.025,87.9 97.525,88.4 C25.2@98.675,88.4 98.675,87.55 99.275,86.95 ; 97.025,87.9 97.025,87.4 97.475,86.95 98.375,86.95 ; 97.975,86.55 98.375,86.95 ; 97.975,86.55 97.975,85.55 98.275,85.25 ; 98.275,85.25 L2.2@99.581,85.25 99.581,86.644 99.275,86.95 ; 98.375,86.95 99.275,86.95
  Top Layer w1.016: XC1.1@79.55,104.025 79.55,102.425 81.65,100.325 81.65,97.975 88.125,91.5 88.125,89.466 89.191,88.4 C26.2@90.575,88.4 90.575,84.175 89.55,83.15 81.05,83.15 78.481,80.581 ; 76.538,79.413 v1(76.147,79.803) v1(76.925,80.581) ; 76.538,79.413 v1(76.925,79.025) 77.313,79.413 ; 76.538,79.413 77.313,79.413 ; v1(76.925,80.581) v1(77.703,79.803) ; v1(76.925,80.581) 78.481,80.581 ; 77.313,79.413 v1(77.703,79.803) ; v1(77.703,79.803) 78.481,80.581
  Bottom Layer w1: v1(97.375,86.25) 95.675,87.95 95.675,92.15 96.775,93.25 v1(106.4,93.25)
  Bottom Layer w1.016: v1(29.85,64.25) v1(29.85,63.15) v1(30.95,63.15) ; 29.875,63.65 30.95,63.65 ; v1@30.025,64.25 v1(30.95,64.25) ; 32.35,63.15 32.05,63.15 ; v1@76.925,80.103 75.822,79 ; v1(30.95,63.15) 32.05,63.15 ; v1(30.95,63.15) 30.95,63.65 ; 30.95,63.65 v1(30.95,64.25) ; v1(30.95,64.25) 32.05,63.15 ; 32.05,63.15 72.05,63.15 75.822,66.922 75.822,77.922 ; 75.822,77.922 v1(76.925,79.025) v1(77.703,79.803) v1(76.925,80.581) v1(76.147,79.803) 75.822,79.478 75.822,79 ; 75.822,77.922 75.822,79
-PV: C5.2 C6.2 C7.2 C8.2 C13.1 C15.1 C16.1 C32.2 D1.4 R2.1 R3.1 R6.1 R13.1 VP2.S VZ1.A X1.2 | length 306.2
  Top Layer w0.635: R2.1@67.85,74.85 R2.1@68,74.7 69.8,74.7 70.257,75.157 70.257,79.043 69.9,79.4 R6.1@69.25,79.4
  Top Layer w0.762: D1.4@33.46,64.159 33.46,62.36 32.85,61.75 C16.1@32.85,60.7 C15.1@32.85,58.5 32.893,58.457 34.784,58.457 VZ1.A@34.784,58.157 34.784,54.461 C32.2@34.945,54.3 ; 34.784,56.225 37.725,56.225 39.1,57.6 39.1,58.45 R13.1@41.4,58.45
  Top Layer w0.889: 23.8,32.7 C8.2@26.025,32.7 ; 26.025,30.525 C8.2@26.025,32.7 ; 26.025,35.1 C8.2@26.025,32.7
  Top Layer w1: 26.075,48.375 26.075,50.925 ; C7.2@26.075,55.5 26.075,50.925 ; 29.175,47.825 27.4,49.6 26.075,50.925 ; VP2.S@45.28,53.9 47.03,53.9 v1(47.3,54.17) ; v1@46.9,53.07 v1(47.3,53.07) ; v1(47.3,50.87) v1(47.3,51.97) v1(47.3,53.07) ; v1(47.3,53.07) 47.3,53.62 ; v1(47.3,53.07) v1(48.4,53.07) v1(49.5,53.07) 49.5,53.62 ; v1(47.3,53.07) 47.85,53.62 ; 47.3,53.62 v1(47.3,54.17) ; 47.3,53.62 47.85,53.62 ; v1(47.3,54.17) v1(48.4,54.17) ; 47.85,53.62 v1(48.4,54.17) ; 47.85,53.62 49.5,53.62 ; v1(48.4,54.17) v1(49.5,54.17) 49.5,53.62
  Top Layer w1.016: C32.2@34.945,54.3 37.975,54.3 38.8,53.475 38.8,51.525 ; 36.575,49.6 36.875,49.6 38.8,51.525 ; 37.409,50.066 39.716,50.066 39.25,49.6 ; 38.8,50.091 38.8,51.525 ; 40.725,49.6 38.8,51.525 ; 44.9,51.2 45,51.2 v1@46.97,51.2 ; 45.23,50.87 v1(47.3,50.87) v1(48.4,50.87) v1(49.5,50.87) v1(49.5,51.97) v1(49.5,53.07)
  Top Layer w2: 36.575,49.6 27.4,49.6 27.3,49.6 26.075,48.375 23.2,45.5 23.2,40.6 21,38.4 21,20.6 23.6,18 23.6,5 25.1,3.5 31.125,3.5 32.5,4.875 32.5,11.65 40.22,19.37 40.22,31.22 45,36 59.3,36 68,44.7 R3.1@68,69.6 R2.1@68,74.7 ; 36.875,49.6 39.25,49.6 40.725,49.6 43.8,49.6 45,50.8 ; 45,51.2 VP2.S@45,53.325 ; 49.5,53.62 50.32,53.62 56.9,60.2 56.9,73.1 59.5,75.7 R2.1@67,75.7
  Bottom Layer w1: VP2.S@44.2,52.82 44.2,51.9 45.23,50.87 v1(47.3,50.87) v1(48.4,50.87) v1(49.5,50.87) v1(49.5,51.97) v1(49.5,53.07) v1(49.5,54.17) ; VP2.S@45,53.62 45.23,53.85 46.98,53.85 v1(47.3,54.17) v1(48.4,54.17) v1(49.5,54.17) ; v1@49.496,54.166 v1(49.5,54.17)
  other v1: 48.4,51.97
\R\E\S\E\T\: C37.1 IC1.3 N1.~RESET R44.1 S1.2 V10.A | length 31.1
  Top Layer w0.229: 39,86.2 39.575,86.2 40.105,86.73 IC1.3@40.105,89.104
  Top Layer w0.508: N1.~RESET@19.835,92.786 19.835,92.19 20.225,91.8 20.225,90.65 C37.1@20.2,90.625 R44.1@21.925,90.625 ; V10.A@21.784,92.782 21.784,90.766 R44.1@21.925,90.625 ; 39,86.2 34.613,86.2 34.113,85.7 26.5,85.7 25.075,87.125 S1.2@23.894,87.125 22.325,87.125 21.925,87.525 R44.1@21.925,90.625
  Top Layer w0.635: S1.2@23.894,87.375 S1.2@23.919,87.4
BAT_+: C1.1 C2.1 C3.1 C4.1 C33.2 C34.2 C35.2 L1.2 PF2.1 PF2.2 R1.1 R30.2 R50.2 U2.4 U2.5 U3.4 U3.5 VP6.S X1.3 | length 685.1
  Top Layer w0.508: v1@95.775,101.6 96.323,101.053 ; U3.5@97.069,100.1 96.275,100.1 ; U3.4@97.069,101.053 96.323,101.053 ; v1@102.775,89.85 103.323,89.302 ; U2.5@104.069,88.35 103.275,88.35 ; U2.4@104.069,89.302 103.323,89.302 ; 95.975,100.753 96.275,101.053 ; 95.975,100.753 95.975,100.4 96.275,100.1 ; 95.975,100.753 95.975,101.005 v1@96.023,101.053 ; v1@96.023,101.053 v1(95.675,101.4) v1(95.675,100.3) 95.875,100.1 96.275,100.1 ; v1@96.023,101.053 96.275,101.053 ; 96.275,101.053 96.323,101.053 ; 102.975,89.002 103.275,89.302 ; 102.975,89.002 102.975,89.255 v1@103.023,89.302 ; 102.975,89.002 102.975,88.65 103.275,88.35 ; v1@103.023,89.302 103.275,89.302 ; v1@103.023,89.302 v1(102.675,89.65) v1(102.675,88.55) 102.875,88.35 103.275,88.35 ; 103.275,89.302 103.323,89.302
  Top Layer w0.762: R50.2@77.575,85.1 v1(79.75,85.1) 80.4,85.75 R1.1@80.4,87.25 ; C2.1@103.175,70.725 v1@106.25,70.725 ; C2.1@103.25,71.35 106.275,71.35 110.425,75.5 110.425,82.725 ; 108.15,71.225 111.775,74.85 ; C34.2@110.425,88.35 110.425,87.075 v1(110.675,86.825) v1(110.675,85.725) 110.425,85.475 C33.2@110.425,84 ; 111.775,81.65 111.775,74.85 ; 104.063,98.338 104.663,98.338 105.125,98.8 ; 104.063,98.338 103.425,98.975 C35.2@103.425,100.1 104.525,100.1 105.125,99.5 ; 104.063,98.338 104.4,98 ; 104.4,98 105.125,98 ; 104.4,98 105.125,97.275 ; 105.125,97.275 105.125,98 ; 105.125,97.275 110.275,97.275 112.125,95.425 112.125,84.85 111.275,84 ; 105.125,98 105.125,98.8 ; 105.125,98.8 105.125,99.5 ; 105.125,99.5 105.6,99.025 109.45,99.025 112.756,95.72 112.756,84.681 ; v1@106.25,70.725 110.925,75.4 110.925,82.225 ; v1@106.25,70.725 106.9,70.725 ; 106.9,70.725 111.25,75.075 111.25,81.825 111.65,82.225 ; 106.9,70.725 108.475,70.725 ; 108.475,70.725 112.65,74.9 112.756,74.9 ; 108.475,70.725 109.25,70.725 112.756,74.231 112.756,74.9 ; 110.425,82.725 110.925,82.225 ; 110.425,82.725 C33.2@110.425,84 ; C33.2@110.425,84 111.275,84 ; 110.925,82.225 111.65,82.225 ; 111.275,84 111.725,84 ; 111.65,82.225 112.175,82.75 ; 111.725,84 112.175,83.55 112.175,82.75 ; 111.725,84 112.075,84 ; 111.775,74.85 112.175,75.25 112.175,82.75 ; 112.075,84 112.756,84.681 ; 112.075,84 112.086,84 112.756,83.331 ; 112.175,82.75 112.756,83.331 ; 112.756,74.9 112.756,83.331 ; 112.756,83.331 112.756,84.681
  Top Layer w0.8: C4.1@93.65,17.15 93.65,18.125 94.305,18.78 VP6.S@97.15,18.78 102.72,18.78 104.475,17.025 R30.2@104.475,15.6
  Top Layer w0.889: C3.1@95.325,66.5 v1(96.875,66.5) ; 103.375,101.175 v1(102.875,101.675) v1(103.975,101.675) 103.475,101.175 ; C35.2@103.425,99.875 C35.2@103.425,100.1 103.425,101.075
  Top Layer w2: PF2.1@53.368,25.107 53.5,24.975 46.375,24.975 44.875,26.475 44.875,32.075 46.2,33.4 47.65,33.4 52.275,33.4 52.715,32.96 53.475,32.2 PF2.1@53.475,26.407 ; PF2.2@56.7,25.275 56.7,27.45 57.5,28.25 57.5,32.765 v1(57.65,32.915) 58.16,33.425 60.55,33.425 63.975,30 63.975,25.175 63.608,24.808 57.167,24.808 PF2.2@56.7,25.275
  Bottom Layer w0.762: v1(79.75,85.1) 83.45,81.4 83.45,73 ; 81.725,71.725 82.175,71.725 83.45,73 ; 83.1,71.725 83.45,72.075 83.45,73 ; 84.725,71.725 83.45,73 ; v1(95.675,100.3) 95.675,100.875 ; 95.675,100.875 103.175,100.875 ; 95.675,100.875 v1(95.675,101.4) ; v1(95.675,101.4) 102.6,101.4 v1(102.875,101.675) ; v1(95.675,101.4) v1@95.95,101.675 ; v1@95.95,101.675 v1(102.875,101.675) ; v1@95.95,101.675 96.1,101.825 ; 96.1,101.825 104,101.825 104.1,101.725 104.1,100.775 103.625,100.3 ; 96.1,101.825 95.925,101.825 95.525,101.425 95.525,100.2 95.6,100.125 103.45,100.125 103.625,100.3 ; v1(102.875,101.675) v1(103.975,101.675) 103.175,100.875 ; 103.175,100.875 102.6,100.3 103.625,100.3
  Bottom Layer w0.889: v1(96.875,66.5) 96.875,68.725 97.1,68.95
  Bottom Layer w1: v1(102.675,89.65) v1(102.675,88.55) 106.35,84.875 109.825,84.875 v1(110.675,85.725) v1(110.675,86.825)
  Bottom Layer w2: 44.775,25.175 35.65,16.05 35.65,6.35 36.9,5.1 42.1,5.1 43.7,6.7 43.7,10.9 46.9,14.1 49.9,14.1 53.35,17.55 53.35,24.45 54.1,25.2 54.1,27.3 53.475,27.925 53.475,32.2 52.715,32.96 52.275,33.4 51.4,33.4 46.2,33.4 44.875,32.075 44.875,25.175 ; 81.725,71.725 78.5,68.5 78.5,29.9 74.7,26.1 67.875,26.1 60.55,33.425 60.15,33.425 58.25,33.425 57.475,32.65 57.475,31.67 57.475,28.125 56.6,27.25 56.6,25.25 57.325,24.525 57.325,18.075 60.3,15.1 90.05,15.1 91.8,16.85 96.925,16.85 97.525,17.45 97.525,55.45 98.825,56.75 102.275,56.75 103.5,55.525 103.5,32.85 107,29.35 111.4,29.35 111.4,55.5 111.4,66.775 108.7,69.475 ; 82.175,71.725 83.1,71.725 86.875,71.725 89.65,68.95 97.1,68.95 99.975,68.95 102.025,71 C2.1@102.9,71 v1(105.038,71) 107.175,71 108.7,69.475 ; 108.7,69.5 108.7,69.475
  other v1: 57.66,30.415 58.91,30.42 60.16,30.425 61.41,30.43 46.405,31.62 47.655,31.625 48.905,31.63 50.155,31.635 51.405,31.64 52.655,31.645 57.655,31.665 58.905,31.67 60.155,31.675 61.405,31.68 46.4,32.87 47.65,32.875 48.9,32.88 50.15,32.885 51.4,32.89 52.65,32.895 58.9,32.92 60.15,32.925 61.4,32.93 106.075,71
FAN_SPEED: IC1.25 R27.2 V7.A | length 26.9
  Top Layer w0.229: IC1.25@44.605,97.617 v1(46.317,97.617)
  Top Layer w0.635: v1(64.15,97.025) 66.025,97.025 66.509,97.509 V7.A@67.493,97.509
  Top Layer w0.762: V7.A@67.643,97.509 68.566,97.509 69.166,96.909 R27.2@70.941,96.909
  Bottom Layer w0.508: v1(46.317,97.617) 61.775,97.617 62.367,97.025 v1(64.15,97.025)
GATE_RECT: C13.2 R11.2 R13.2 V4.A VP2.G VZ1.K | length 15.8
  Top Layer w0.762: VZ1.K@35.8,60.443 35.893,60.35 R13.2@41.4,60.35 ; R13.2@41.6,60.35 41.85,60.6 R11.2@41.85,62.5 43.1,62.5 43.884,61.716 V4.A@43.884,61.057 43.884,59.8 ; VP2.G@45,58.7 VP2.G@44.984,58.7 ; 43.884,59.8 43.884,59.016 44.2,58.7 VP2.G@44.984,58.7 ; 43.884,59.8 VP2.G@44.984,58.7
GATE_SW: C20.2 R20.2 R22.2 V6.A VP1.G VZ3.K | length 15.3
  Top Layer w0.635: VZ3.K@6.1,57.318 6.1,58.65 7.8,60.35 C20.2@9.6,60.35 R22.2@11.7,60.35 12.05,60.7 R20.2@12.05,62.4 12.841,62.4 V6.A@14.084,61.157 14.084,59.716 ; VP1.G@14.084,59.516 14.084,59.716 ; VP1.G@15,58.8 14.084,59.716

## Text inside footprints (layer, text, board x,y; h text height)
C1: Top Overlay "+" at 86.611,64.801 h1.59 r90
C2: Top Overlay "+" at 103.611,64.701 h1.59 r90
C5: Top Overlay "+" at 9.725,31.1 h1.59
C6: Top Overlay "+" at 29.567,32.8 h1.59
C17: Top Overlay "+" at 2.9,53 h1.52
C27: Top Overlay "+" at 95.31,83.211 h1.52 r90
C31: Top Overlay "+" at 88.385,95.386 h1.52 r90
C32: Top Overlay "+" at 27.262,53.665 h1.52
D1: Top Overlay "1" at 36.4,76.825 h1 r90
D2: Top Overlay "1" at 5.825,77.05 h1 r90
H1: Top Overlay "K" at 31.343,105.772 h0.79 r270
H2: Top Overlay "K" at 21.743,105.721 h0.79 r270
H3: Top Overlay "K" at 16.944,105.721 h0.79 r270
H4: Top Overlay "K" at 26.543,105.728 h0.79 r270
IC1: Top Overlay "1" at 37.75,85.875 h1
P1: Top Overlay "2" at 46.4,106.6 h1.27; Top Overlay "1" at 46.625,102.575 h1.27; Top Overlay "11" at 62.35,100.05 h1.27; Top Overlay "12" at 62.775,107.375 h1.27
U1: Top Overlay "1" at 67.894,87.094 h0.76 r270
U2: Top Overlay "1" at 107.244,86.572 h0.79 r90
U3: Top Overlay "1" at 100.244,98.322 h0.79 r90
V5: Top Overlay "K" at 4.6,37.475 h0.95; Top Overlay "A" at 7.725,36.5 h0.95
V8: Top Overlay "K" at 102.175,86.85 h0.95
V9: Top Overlay "K" at 95.775,99.5 h0.95 r180
VP1: Top Overlay "D" at 13.3,56.3 h0.76 r270; Top Overlay "S" at 11.75,50.225 h0.76; Top Overlay "G" at 14.625,64.9 h0.76
VP2: Top Overlay "D" at 49.25,55.85 h1; Top Overlay "S" at 44.5,49.2 h1; Top Overlay "G" at 47.35,62.675 h1
VP3: Top Overlay "G" at 14.5,87.525 h0.95; Top Overlay "D" at 11.05,84.6 h0.95
VP4: Top Overlay "G" at 8.942,87.878 h0.95; Top Overlay "D" at 5.7,84.725 h0.95
VP5: Top Overlay "D" at 72.325,99.25 h0.95
VP6: Bottom Overlay "G" at 93.975,13.471 h0.76 r270; Bottom Overlay "S" at 93.975,18.602 h0.76 r270; Bottom Overlay "D" at 93.975,16.062 h0.76 r270
VP7: Top Overlay "S" at 83.109,90.234 h0.95 r180; Top Overlay "G" at 87.275,90.259 h0.95 r180; Top Overlay "D" at 86.475,86.85 h0.95 r180